# EAGLE board CMWX_LoRa_GPS_v14_CAM (EAGLE 9.5.1)
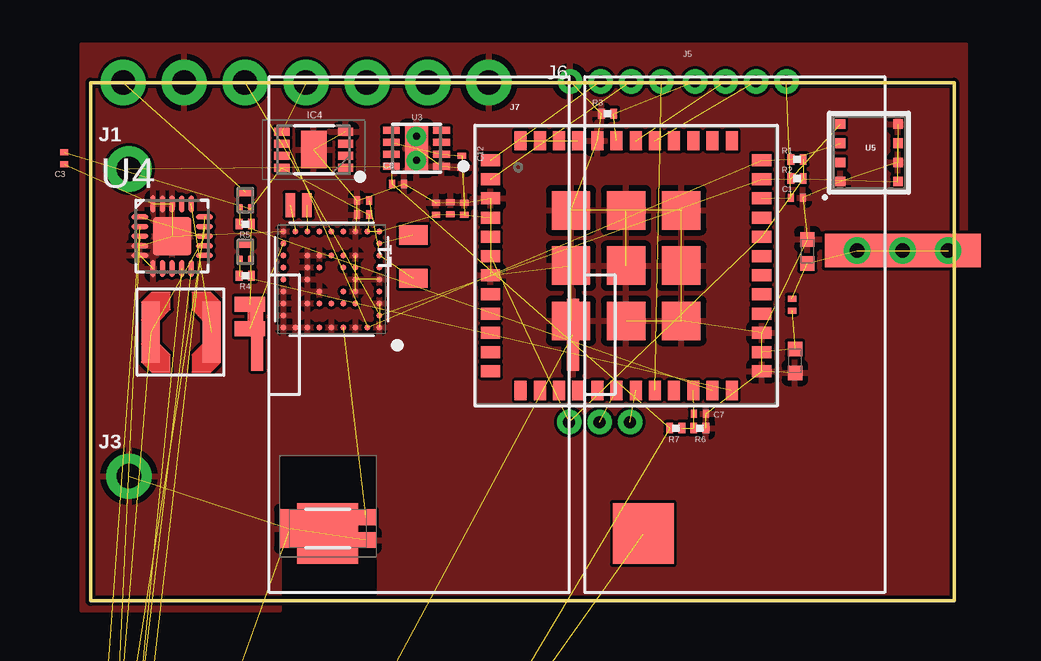
[diagram p0: board, top side]
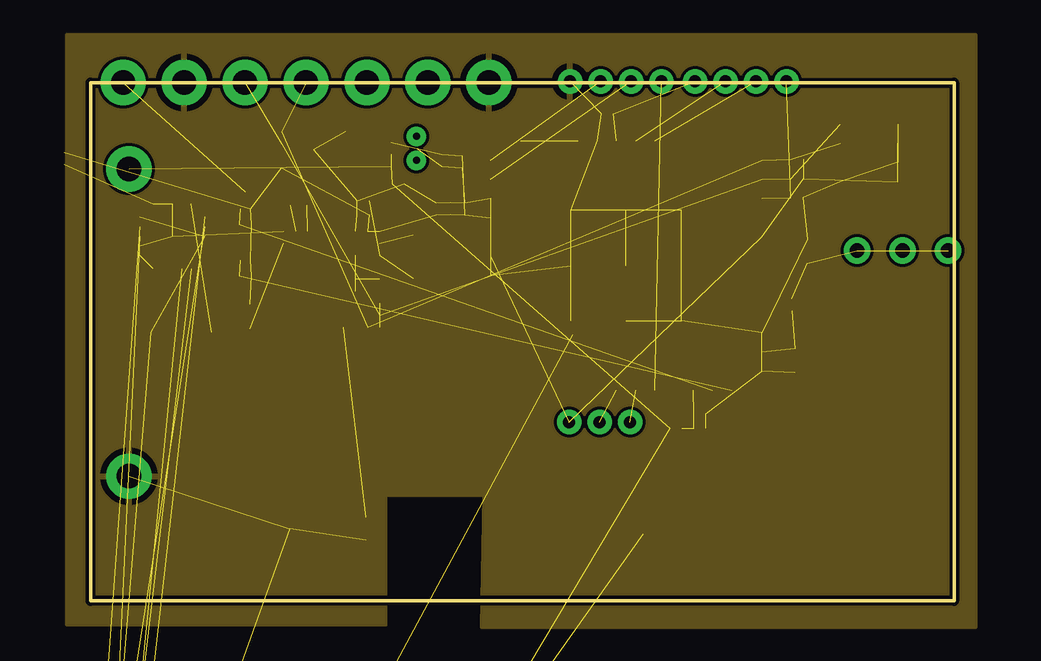
[diagram p1: board, inner layer Route2]
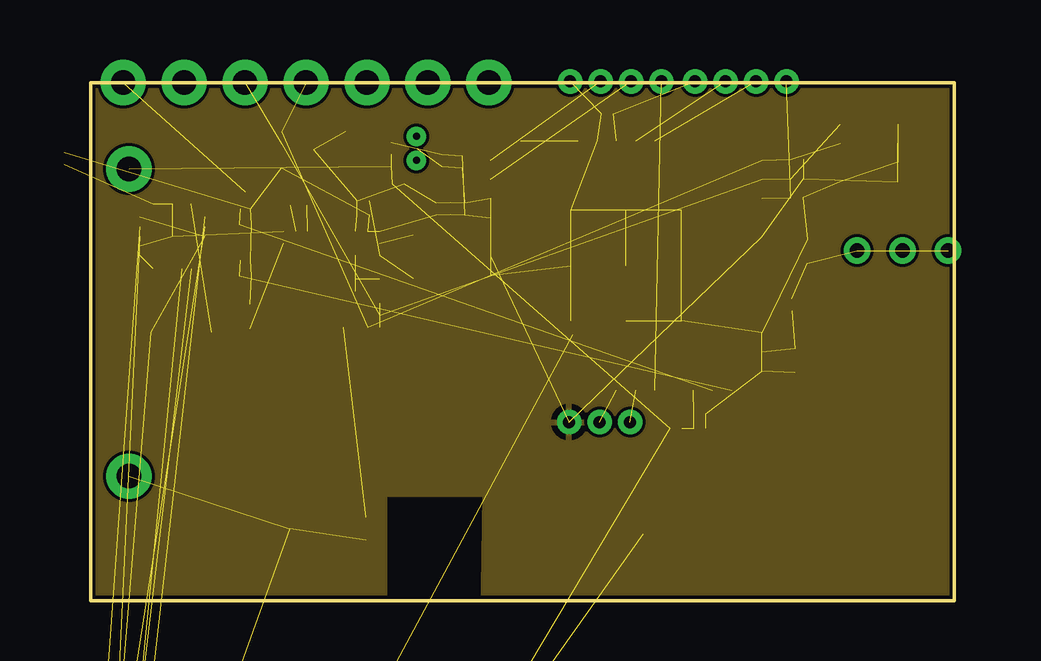
[diagram p2: board, inner layer Route15]

Size 36 x 21.6 mm. Coordinates in mm from the lower left corner, seen from the top.
Outline: 0,0 0,21.6 36,21.6 36,0 0,0
Copper layers (1+2*15+16): Top 0.035mm / dielectric 0.2mm / Route2 0.035mm / dielectric 0.23mm / Route15 0.035mm / dielectric 0.2mm / Bottom 0.035mm
Design rules "default *": minimum track width 5mil, minimum drill 0.25mm, track to track 5mil, track to pad 5mil, pad to pad 5mil, via to via 5mil, smd to smd 5mil, copper to edge 5mil, drill to drill 3mil, minimum pad ring 10mil, minimum via ring 5mil, stop-mask expansion 4mil, vias tented up to drill 0mil, thermal gap 10mil
Net classes: 1 vcc: width 0 mm

## Footprints (pad centres in the part's own frame; a part is rotated, then mirrored left to right if it is on the bottom)
C0201 = smd 0.25 x 0.35: 1 -0.25,0; 2 0.25,0
SON50P300X200X55-9N = smd 0.63 x 0.32: 1 -1.33,0.75; 2 -1.33,0.25; 3 -1.33,-0.25; 4 -1.33,-0.75; 5 1.33,-0.75; 6 1.33,-0.25; 7 1.33,0.25; 8 1.33,0.75 | smd 1.06 x 1.56: 9 0,0
1X01_NO_SILK = drill 1.016 pad 1.88: 1 0,0
1X03_1.27MM_NO_SILK = drill 0.508 pad 1: 1 0,0; 2 1.27,0; 3 2.54,0
1X04_1.27MM_NO_SILK = drill 0.508 pad 1: 1 0,0; 2 1.27,0; 3 2.54,0; 4 3.81,0
1X07_NO_SILK = drill 1.016 pad 1.88: 1 0,0; 2 2.54,0; 3 5.08,0; 4 7.62,0; 5 10.16,0; 6 12.7,0; 7 15.24,0
SMT-JUMPER_2_NC_TRACE_NO-SILK = smd 0.635 x 1.27: 1 -0.508,0; 2 0.508,0
0805 = smd 0.8 x 1.2: 1 -0.9,0; 2 0.9,0
0402-TIGHT = smd 0.6 x 0.6: 1 -0.5,0; 2 0.5,0
SOT883(B) = smd 0.4 x 0.25: 1 -0.35,0.225; 2 -0.35,-0.225 | smd 0.4 x 0.7: 3 0.35,0
R0201 = smd 0.28 x 0.43: 1 -0.255,0; 2 0.255,0
TYPEABZ = smd 0.8 x 0.5: P$1 -5.65,4.4; P$2 -5.65,3.6; P$3 -5.65,2.8; P$4 -5.65,2; P$5 -5.65,1.2; P$6 -5.65,0.4; P$7 -5.65,-0.4; P$8 -5.65,-1.2; P$9 -5.65,-2; P$10 -5.65,-2.8; P$11 -5.65,-3.6; P$12 -5.65,-4.4; P$25 5.65,-4.4; P$26 5.65,-3.6; P$27 5.65,-2.8; P$28 5.65,-2; P$29 5.65,-1.2; P$30 5.65,-0.4; P$31 5.65,0.4; P$32 5.65,1.2; P$33 5.65,2; P$34 5.65,2.8; P$35 5.65,3.6; P$36 5.65,4.4 | smd 0.5 x 0.8: P$13 -4.4,-5.2; P$14 -3.6,-5.2; P$15 -2.8,-5.2; P$16 -2,-5.2; P$17 -1.2,-5.2; P$18 -0.4,-5.2; P$19 0.4,-5.2; P$20 1.2,-5.2; P$21 2,-5.2; P$22 2.8,-5.2; P$23 3.6,-5.2; P$24 4.4,-5.2; P$37 4.4,5.2; P$38 3.6,5.2; P$39 2.8,5.2; P$40 2,5.2; P$41 1.2,5.2; P$42 0.4,5.2; P$43 -0.4,5.2; P$44 -1.2,5.2; P$45 -2,5.2; P$46 -2.8,5.2; P$47 -3.6,5.2; P$48 -4.4,5.2 | smd 1.6 x 1.6: P$49 -2.3,2.3; P$50 0,2.3; P$51 2.3,2.3; P$52 -2.3,0; P$53 0,0; P$54 2.3,0; P$55 -2.3,-2.3; P$56 0,-2.3; P$57 2.3,-2.3
UBLOX_ZOE_M8-0-10 = smd 0.25 x 0.25: 1 -1.996,2.004; 2 -1.496,2.004; 3 -0.996,2.004; 4 -0.496,2.004; 5 0.004,2.004; 6 0.504,2.004; 7 1.004,2.004; 8 1.504,2.004; 9 2.004,2.004; 10 2.004,1.504; 11 2.004,1.004; 12 2.004,0.504; 13 2.004,0.004; 14 2.004,-0.496; 15 2.004,-0.996; 16 2.004,-1.496; 17 2.004,-1.996; 18 1.504,-1.996; 19 1.004,-1.996; 20 0.504,-1.996; 21 0.004,-1.996; 22 -0.496,-1.996; 23 -0.996,-1.996; 24 -1.496,-1.996; 25 -1.996,-1.996; 26 -1.996,-1.496; 27 -1.996,-0.996; 28 -1.996,-0.496; 29 -1.996,0.004; 30 -1.996,0.504; 31 -1.996,1.004; 32 -1.996,1.504; 33 -0.996,1.004; 34 -0.496,1.004; 35 0.004,1.004; 36 0.504,1.004; 37 1.004,1.004; 38 1.004,0.004; 39 1.004,-0.496; 40 1.004,-0.996; 41 0.504,-0.996; 42 0.004,-0.996; 43 -0.496,-0.996; 44 -0.996,-0.996; 45 -0.996,-0.496; 46 -0.996,0.004; 47 -0.996,0.504; 48 -0.496,0.504; 49 0.504,0.504; 50 0.504,-0.496; 51 -0.496,-0.496
MICROCHIP_MCP1810T-33I-J8A_0 = smd 0.7 x 0.3: 1 -1.05,0.75; 2 -1.05,0.25; 3 -1.05,-0.25; 4 -1.05,-0.75; 5 1.05,-0.75; 6 1.05,-0.25; 7 1.05,0.25; 8 1.05,0.75 | smd 0.95 x 1.95: 9 0,0 | drill 0.3 pad 0.6: PAD_1 0,0.5; PAD_2 0,-0.5
SPV1050 = smd 0.7 x 0.2: P$1 -1.35,0.8; P$2 -1.35,0.4; P$3 -1.35,0; P$4 -1.35,-0.4; P$5 -1.35,-0.8; P$11 1.35,-0.8; P$12 1.35,-0.4; P$13 1.35,0; P$14 1.35,0.4; P$15 1.35,0.8 | smd 0.2 x 0.7: P$6 -0.8,-1.35; P$7 -0.4,-1.35; P$8 0,-1.35; P$9 0.4,-1.35; P$10 0.8,-1.35; P$16 0.8,1.35; P$17 0.4,1.35; P$18 0,1.35; P$19 -0.4,1.35; P$20 -0.8,1.35 | smd 1.6 x 1.6: P$21 0,0
LGA3.0X3.0 = smd 0.4 x 0.4: 1 1.2,1.2; 2 1.2,0.4; 3 1.2,-0.4; 4 1.2,-1.2; 5 -1.2,-1.2; 6 -1.2,-0.4; 7 -1.2,0.4; 8 -1.2,1.2
LPS_3015 = smd 0.75 x 2.54: P$1 -1.3,0; P$2 1.25,0
ICARUS_NITINOL_ANTENNA = smd 6.5 x 1.4: P$1 0,0 | drill 0.6: P$2 0,0; P$3 1.9,0; P$4 -1.9,0
ICARUS_FULL = smd 2.54 x 2.54: P$1 -3.81,-8.29 | smd 0.5 x 3: P$2 -6.75,0
CRYSTAL-SMD-1.0X1.2MM = smd 0.4 x 1: P$1 0.35,0; P$2 -0.35,0
W3011 = smd 0.8 x 0.65: 1 1.6,0.475; 2 1.6,-0.475 | smd 0.8 x 1.6: 3 -1.6,0

## Placement (x,y rotation side)
C1  0.1 uF  [C0201]  29.45,16.8 0 top
C2  10 uF  [C0201]  14.4,16.34 270 top
C3  0.1 uF  [C0201]  -1.1,18.45 270 top
C4  10nF  [C0201]  -0.1,-35.05 0 top  (outside the outline)
C5  4.7 uF  [C0201]  11.35,16.68 180 top
C6  0.1 uF  [C0201]  11.35,16.1 180 top
C7  0.1 uF  [C0201]  25.4,7.8 0 top
C8  4.7 uF  [C0201]  12.82,17.38 0 top
C9  1 uF  [C0201]  15,16.36 270 top
C10  0.1 uF  [C0201]  15.58,16.35 270 top
C11  0.1 uF  [C0201]  29.24,12.34 270 top
C12  10 uF  [C0201]  15.48,18.3 270 top
C13  47uF  [C0201]  -0.1,-38.55 0 top  (outside the outline)
C14  4.7 uF  [C0201]  -9.55,-43.45 0 top  (outside the outline)
IC4  CAT24M01HU5I-GT3  [SON50P300X200X55-9N]  9.3,18.8 180 top
J1  [1X01_NO_SILK]  1.6,18 0 top
J3  [1X01_NO_SILK]  1.6,5.2 0 top
J4  [1X03_1.27MM_NO_SILK]  19.95,7.45 0 top
J5  [1X04_1.27MM_NO_SILK]  25.2,21.65 0 top
J6  [1X04_1.27MM_NO_SILK]  23.8,21.65 180 top
J7  [1X07_NO_SILK]  16.6,21.6 180 top
JP1  JUMPER-SMT_2_NC_TRACE_NO-SILK  [SMT-JUMPER_2_NC_TRACE_NO-SILK]  6.65,11.85 270 top
JP2  JUMPER-SMT_2_NC_TRACE_NO-SILK  [SMT-JUMPER_2_NC_TRACE_NO-SILK]  -3.05,-37.6 0 top  (outside the outline)
L1  2.2µH/< 0.2 ohm /500mA  [0805]  13.45,14.35 90 top
L3  FERRITE_BEAD-120_OHM_TIGHT  [0402-TIGHT]  29.36,10.01 270 top
L4  FERRITE_BEAD-120_OHM_TIGHT  [0402-TIGHT]  29.88,14.57 90 top
PDTA143TMB,1  TINYPICO-PNPAMB  [SOT883(B)]  6.45,16.7 90 top
PDTA143TMB,315  TINYPICO-PNPAMB  [SOT883(B)]  6.45,14.55 90 top
R1  4.7 k  [R0201]  29.45,18.4 0 top
R2  4.7 k  [R0201]  29.45,17.6 0 top
R3  10k  [R0201]  21.55,20.3 0 top
R4  100k  [R0201]  6.45,13.55 0 top
R5  100k  [R0201]  6.45,15.7 0 top
R6  10 M  [R0201]  25.4,7.2 180 top
R7  4.7 M  [R0201]  24.4,7.2 180 top
R8  3M  [R0201]  -0.1,-17.55 0 top  (outside the outline)
R9  9.1M  [R0201]  -0.1,-21.05 0 top  (outside the outline)
R10  6.2M  [R0201]  -0.1,-24.55 0 top  (outside the outline)
R11  1M  [R0201]  -0.1,-28.05 0 top  (outside the outline)
R12  3M  [R0201]  -0.1,-31.55 0 top  (outside the outline)
U1  TYPEABZ  [TYPEABZ]  22.33,13.97 0 top
U2  UBLOX_ZOE_M8-0-10  [UBLOX_ZOE_M8-0-10]  10.05,13.4 180 top
U3  MICROCHIP_MCP1810T-33I-J8AMICROCHIP_MCP1810T-33I-J8A_0_0  [MICROCHIP_MCP1810T-33I-J8A_0]  13.59,18.86 180 top
U4  SPV1050  [SPV1050]  3.4,15.2 0 top
U5  BME680BME680  [LGA3.0X3.0]  32.46,18.67 180 top
U$1  LPS3015  [LPS_3015]  3.8,11.2 0 top
U$2  NITINOL_ANTENNA  [ICARUS_NITINOL_ANTENNA]  33.85,14.6 0 top
U$3  ICARUS_FULL  [ICARUS_FULL]  26.85,11.1 0 top
U$4  ICARUS_FULL  [ICARUS_FULL]  13.7,11.1 0 top
Y1  32.768kHz  [CRYSTAL-SMD-1.0X1.2MM]  8.67,16.49 0 top
Y2  W3011  [W3011]  9.89,3.01 0 top

## Library data of the parts
C1-C14 = rcl; SPICEPREFIX: C
IC4 = CAT24M01HU5I-GT3-CorrectedV2; ALLIED_NUMBER: 70300250; ALLIED_PRICE-STOCK: http://www.alliedelec.com/on-semiconductor-cat24m01hu5i-gt3/70300250/; DESCRIPTION: EEPROM 1MB I2C SERIAL EEPROM; HEIGHT: 0.55mm; MANUFACTURER_NAME: ON Semiconductor; MANUFACTURER_PART_NUMBER: CAT24M01HU5I-GT3; MOUSER_PART_NUMBER: 863-CAT24M01HU5I-GT3; MOUSER_PRICE-STOCK: https://www.mouser.com/Search/Refine.aspx?Keyword=863-CAT24M01HU5I-GT3; RS_PART_NUMBER: 7814831P; RS_PRICE-STOCK: http://uk.rs-online.com/web/p/products/7814831P
J1 J3-J7 = SparkFun-Connectors
JP1 JP2 = SparkFun-Jumpers
L1 = SparkFun-Coils; PROD_ID: NDUC-13076
L3 L4 = SparkFun-Coils
PDTA143TMB,1 PDTA143TMB,315 = UnexpectedMaker
R1-R12 = rcl; SPICEPREFIX: R
U1 = Kris
U2 = SparkFun-GPS; PROD_ID: IC-14251
U3 = MCP1810; CENTROID_NOT_SPECIFIED: No; DATASHEET: http://ww1.microchip.com/downloads/en/DeviceDoc/20005623A.pdf; DIGIKEY_DESCRIPTION: IC REG LINEAR 150MA 8-VDFN; DIGIKEY_PART_NUMBER: MCP1810T-33I/J8ACT-ND; IPC_LAND_PATTERN_NAME: DFN200X200X85-8; LEAD_FREE: yes; MF: Microchip; MFG_PACKAGE_IDENT: C04-3207A; MOUSER_PART_NUMBER: 579-MCP1810T-33I/J8A; MPN: MCP1810T-33I/J8A; PACKAGE: VDFN8; PREFIX: U; ROHS: yes; TEMPERATURE_RANGE_HIGH: +85°C; TEMPERATURE_RANGE_LOW: -40°C
U4 = STM-SPV1050_V2
U5 = SparkFun-Sensors; PROD_ID: IC-14656
U$1 = coilcraft_custom
U$2 = Antenna_mounts
U$3 U$4 = TrisolX_Solar_Cells
Y1 = SparkFun-Clocks; XTAL: SC12S-7PF20PPM
Y2 = SparkFun-GPS; PROD_ID: ANT-14304

## Nets
ANT: C11.1 L4.1 U$2.P$1 U$2.P$2 U$2.P$3 U$2.P$4
BAT: C8.1 J1.1 JP2.2 R7.2 U3.7 U3.8
BOOT: J5.1 R3.2 U1.P$43
DM: J6.2 U1.P$2
DP: J6.3 U1.P$1
GND: C1.2 C2.1 C3.2 C4.2 C5.2 C6.2 C7.2 C8.2 C9.1 C10.1 C12.2 C13.2 C14.2 IC4.4 IC4.9 J3.1 J6.4 J7.1 J7.6 L3.2 L4.2 R3.1 R6.1 R9.1 R12.1 U1.P$3 U1.P$7 U1.P$25 U1.P$27 U1.P$44 U1.P$49 U1.P$50 U1.P$51 U1.P$52 U1.P$53 U1.P$54 U1.P$55 U1.P$56 U1.P$57 U2.1 U2.3 U2.5 U2.7 U2.8 U2.9 U2.10 U2.11 U2.12 U2.17 U2.23 U2.29 U2.31 U2.37 U2.38 U2.39 U2.40 U2.41 U2.44 U2.46 U2.47 U2.49 U3.1 U3.9 U4.P$4 U4.P$5 U4.P$6 U4.P$18 U4.P$19 U4.P$20 U4.P$21 U5.1 U5.5 U5.7 U$3.P$2 Y2.2 Y2.3
GPS_ANT [antenna]: U2.4 Y2.1
N$1: U1.P$45 U1.P$48
N$2: JP1.2 U2.16
N$3: C5.1 L1.1 U2.27
N$4: U4.P$16 U$1.P$2
N$5: L1.2 U2.26
N$6: R8.1 R9.2 U4.P$2
N$8: R10.1 R11.2 U4.P$10
N$9: R11.1 R12.2 U4.P$9
N$10: JP2.1 U4.P$14
N$11: C14.1 R8.2 U4.P$1 U4.P$13 U$1.P$1 U$3.P$1
N$12: C13.1 R10.2 U4.P$15
N$13: C4.1 U4.P$3
N$14: U2.18 Y1.P$2
N$15: U2.19 Y1.P$1
N$32: C11.2 L3.1 U1.P$26
POWER: C2.2 C3.1 C6.1 C9.2 C10.2 C12.1 IC4.8 J4.1 JP1.1 PDTA143TMB,1.2 PDTA143TMB,315.2 R1.2 R2.2 R4.2 R5.2 U1.P$4 U1.P$5 U1.P$6 U1.P$32 U2.24 U2.25 U3.2 U3.6 U5.6 U5.8
PWM: J7.2
RDY: J7.3
RST: C1.1 J5.4 U1.P$34
RX: J4.2 U1.P$18
SCD_PDTA: PDTA143TMB,1.1 R5.1 U1.P$23
SCD_PWR: J7.7 PDTA143TMB,1.3
SCL: IC4.6 J7.5 R2.1 U1.P$35 U2.32 U5.4
SDA: IC4.5 J7.4 R1.1 U1.P$36 U2.2 U5.3
SWDCLK: J5.2 U1.P$42
SWDIO: J5.3 U1.P$41
TCXO_OUT: U1.P$46 U1.P$47
TX: J4.3 U1.P$19
VBUS: J6.1 U1.P$20
VOLT_MEAS: C7.1 R6.2 R7.1 U1.P$22
ZOE_PDTA: PDTA143TMB,315.1 R4.1 U1.P$24
ZOE_PWR: PDTA143TMB,315.3

## Tracks (layer width: path | path; a pad name or v marks a point on that pad's centre or on a via)
ANT  (4 unrouted)
BAT  (5 unrouted)
BOOT  (2 unrouted)
DM  (1 unrouted)
DP  (1 unrouted)
GND  (55 unrouted)
  pour Route2: -1,23.6 36.9,23.6 36.9,-1.1 16.3,-1.1 16.4,4.4 12.3,4.4 12.3,-1.01 -1,-0.99
  pour Top: -0.4,23.2 36.5,23.2 36.5,-0.4 12,-0.4 12,6.1 7.9,6.1 7.9,-0.4 -0.4,-0.4
GPS_ANT  (1 unrouted)
N$1  (1 unrouted)
N$2  (1 unrouted)
N$3  (2 unrouted)
N$4  (1 unrouted)
N$5  (1 unrouted)
N$6  (2 unrouted)
N$8  (2 unrouted)
N$9  (2 unrouted)
N$10  (1 unrouted)
N$11  (5 unrouted)
N$12  (2 unrouted)
N$13  (1 unrouted)
N$14  (1 unrouted)
N$15  (1 unrouted)
N$32  (2 unrouted)
POWER  (24 unrouted)
  pour Route15: -1.2,23.4 36.7,23.4 36.7,-0.7 16.32,-0.7 16.4,4.4 12.3,4.4 12.3,-0.7 -1.2,-0.7
RST  (2 unrouted)
RX  (1 unrouted)
SCD_PDTA  (2 unrouted)
SCD_PWR  (1 unrouted)
SCL  (5 unrouted)
SDA  (5 unrouted)
SWDCLK  (1 unrouted)
SWDIO  (1 unrouted)
TCXO_OUT  (1 unrouted)
TX  (1 unrouted)
VBUS  (1 unrouted)
VOLT_MEAS  (3 unrouted)
ZOE_PDTA  (2 unrouted)